# Altium PCB stm32f407_DB.PcbDoc
Units mil, origin at the board's own origin, x right, y up, seen from the top; angles counter-clockwise.
Board outline 2066.93 x 2066.93 mil, 2 copper layers (Top Layer, Bottom Layer); 49 components, 99 nets, 305 pads, 59 vias.
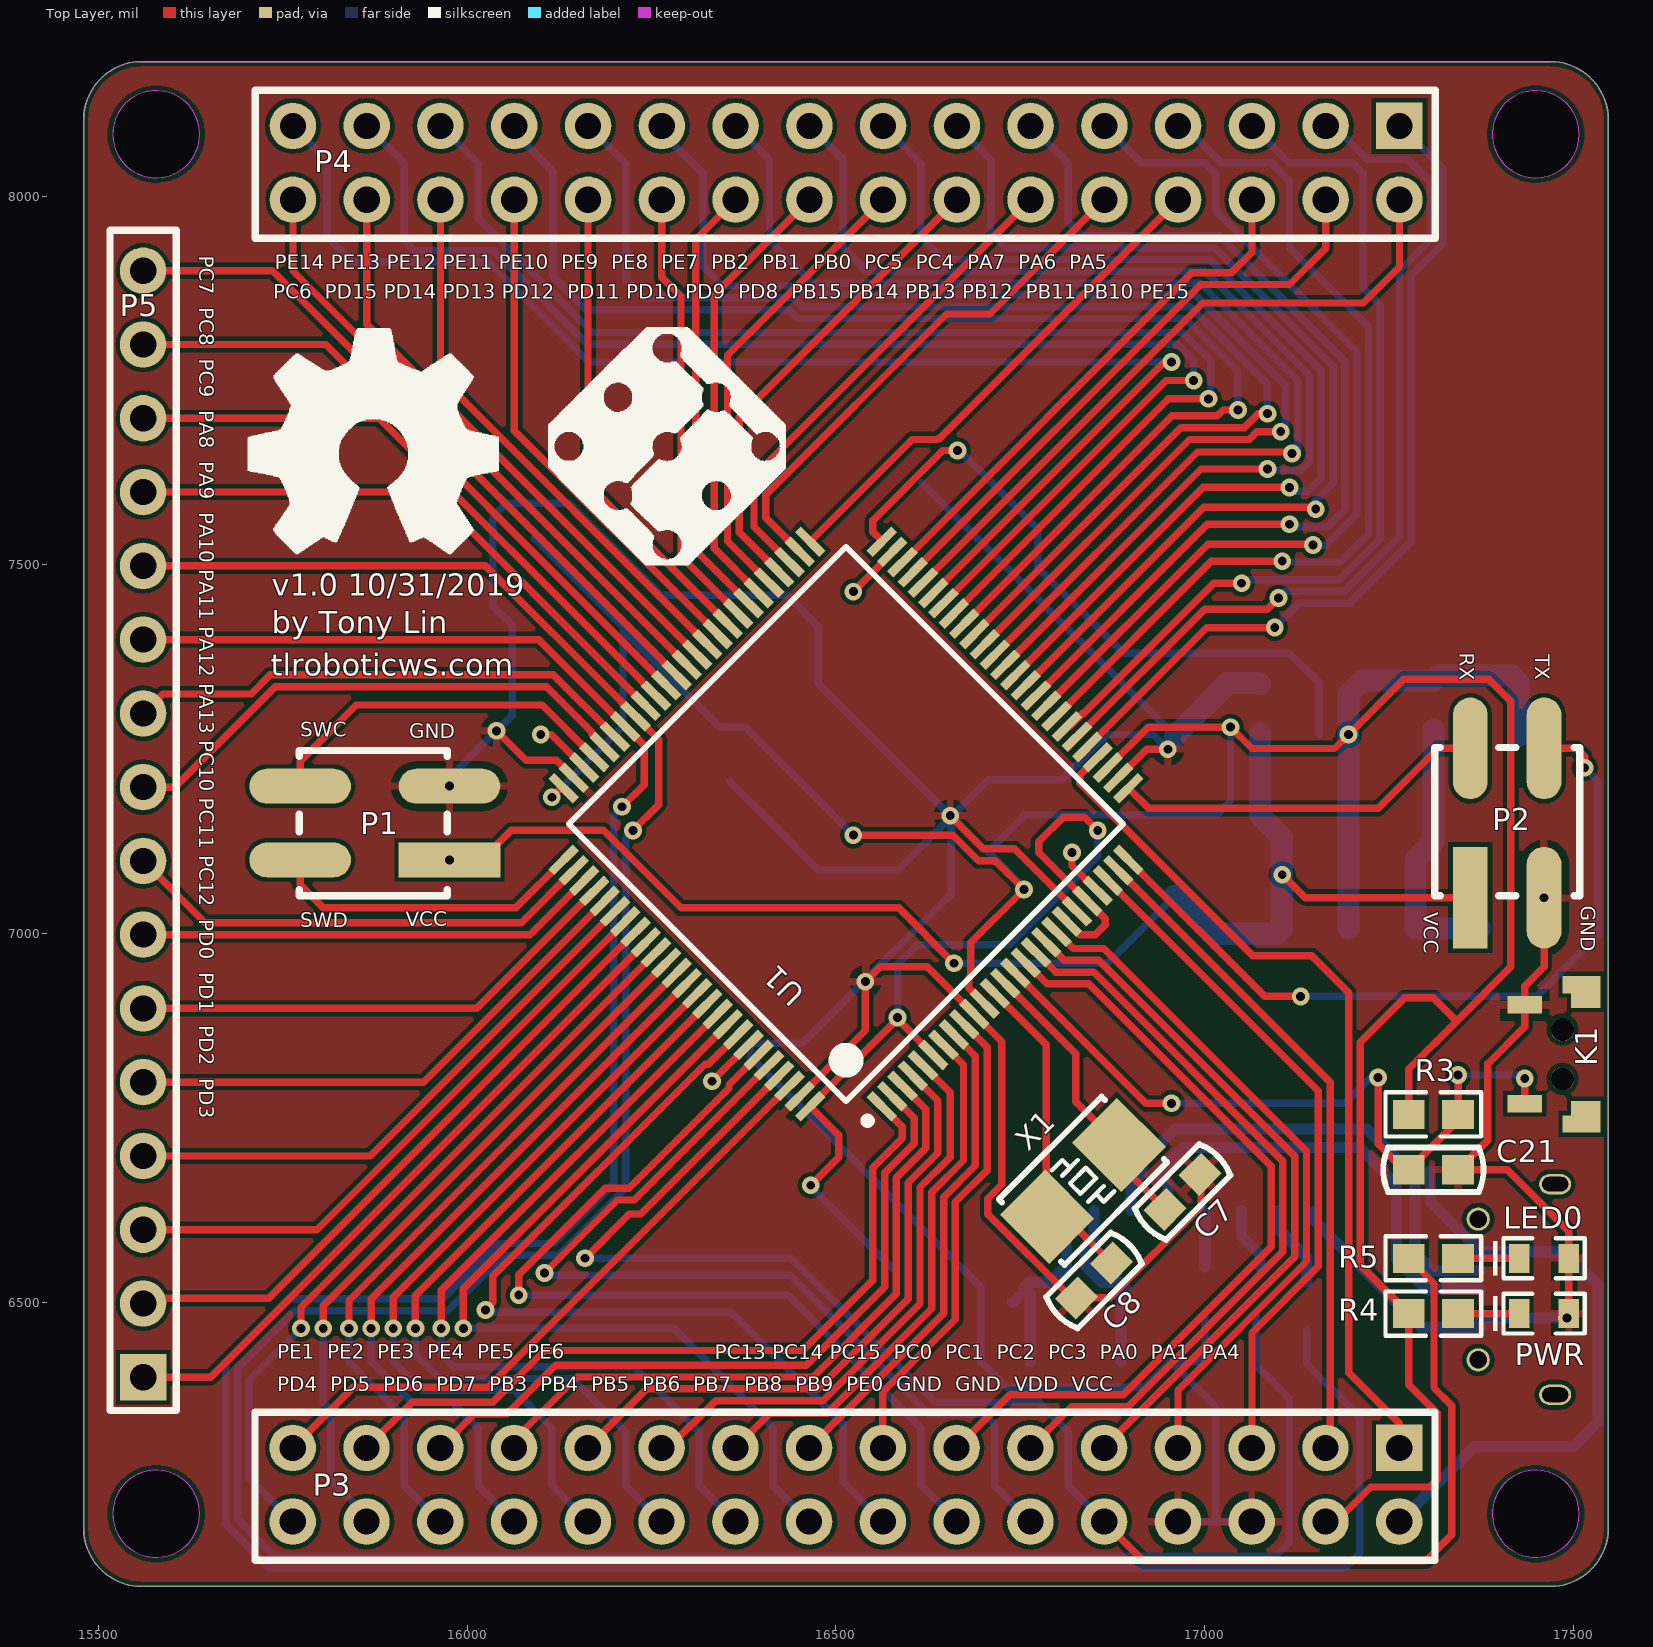
[diagram p0: Top Layer view]
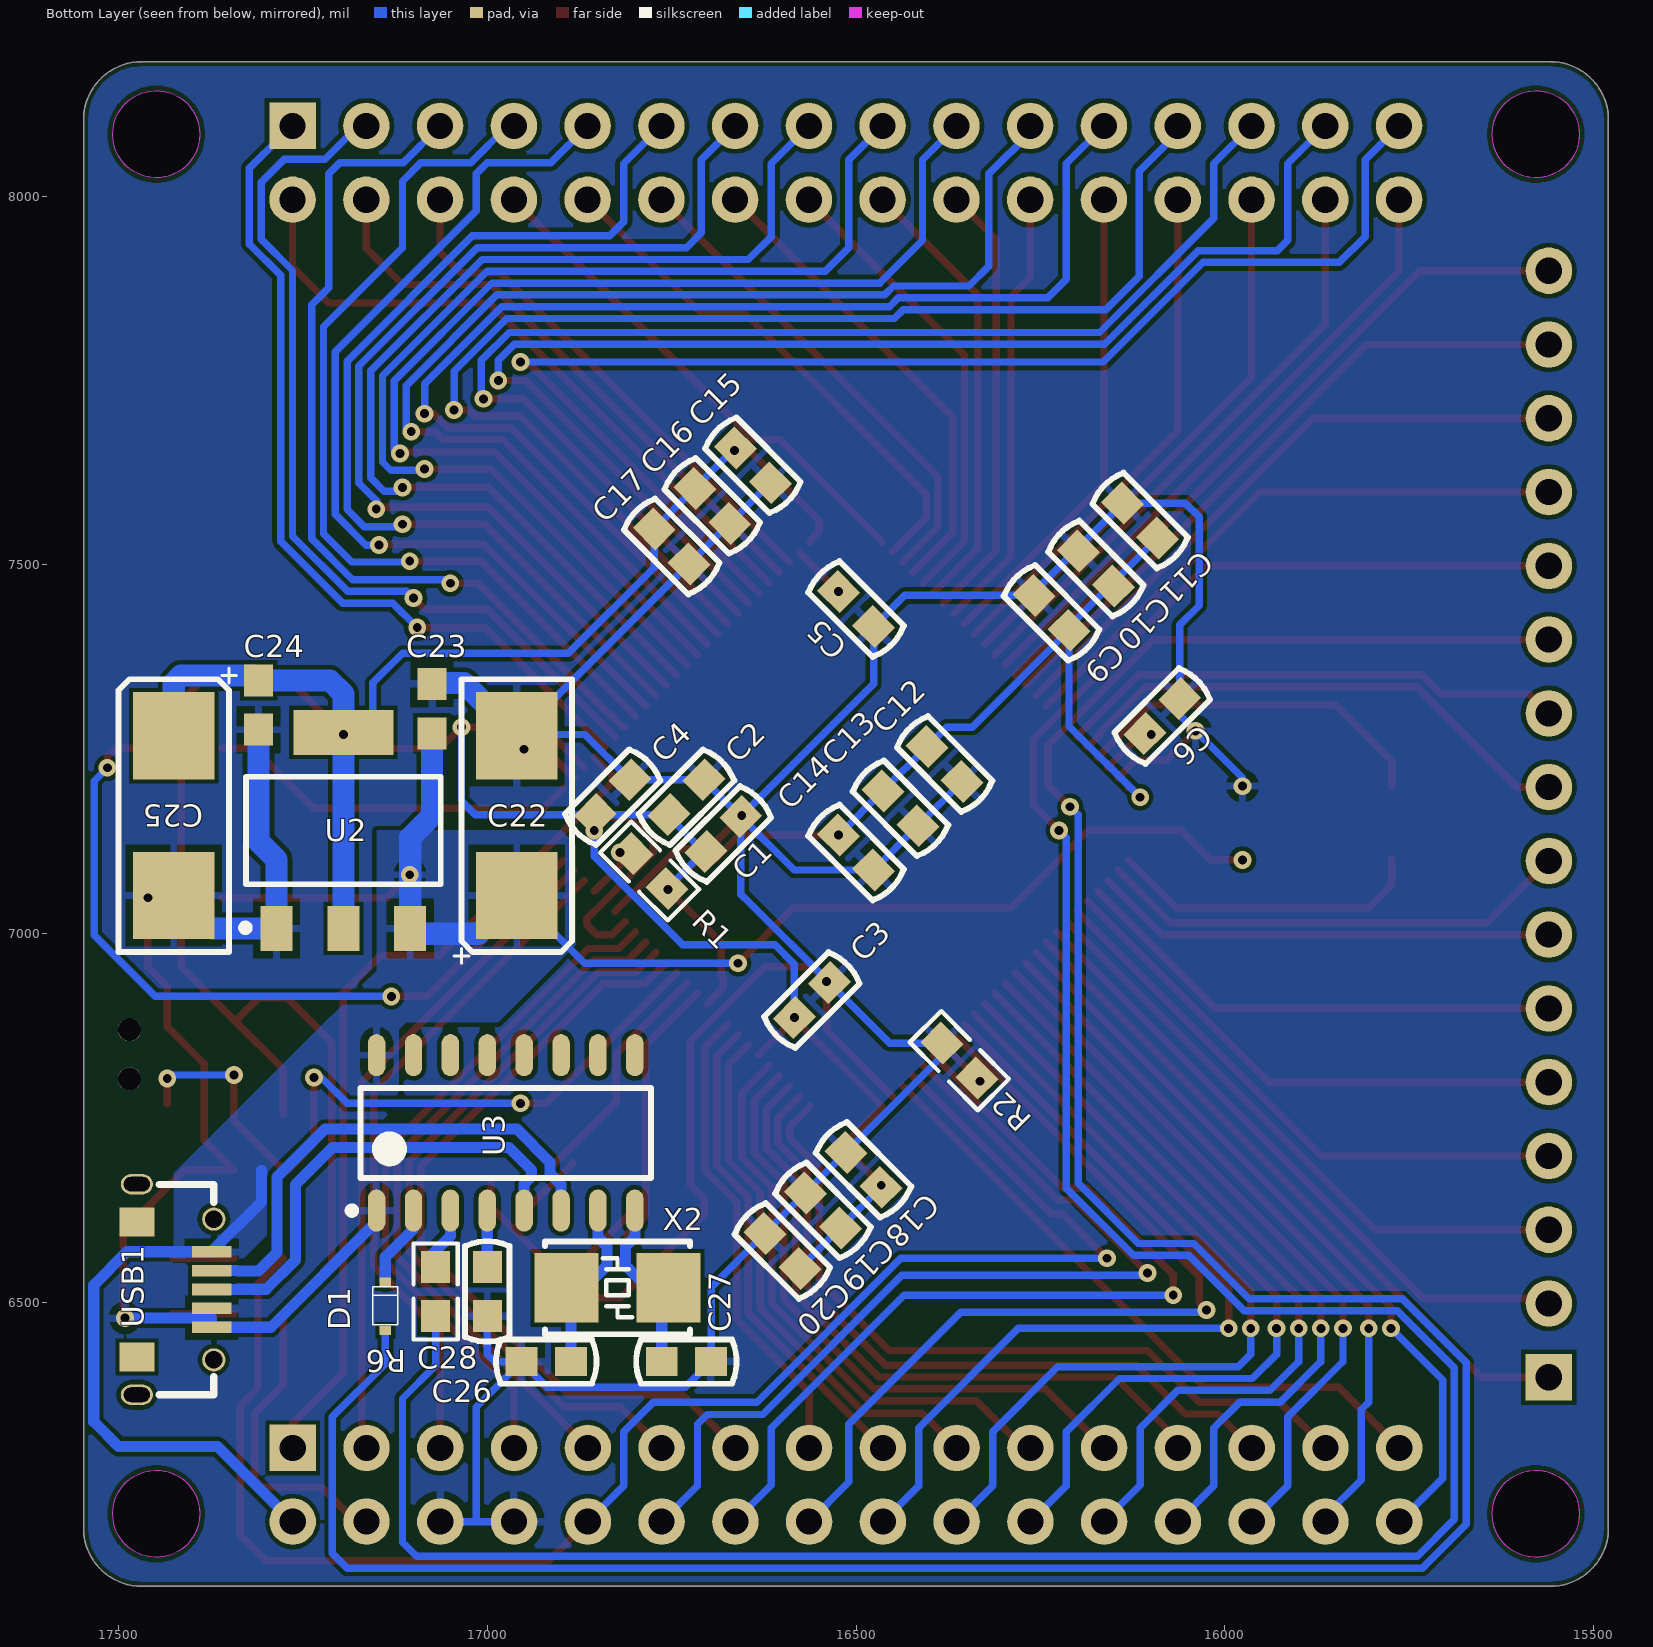
[diagram p1: Bottom Layer view, seen from below]
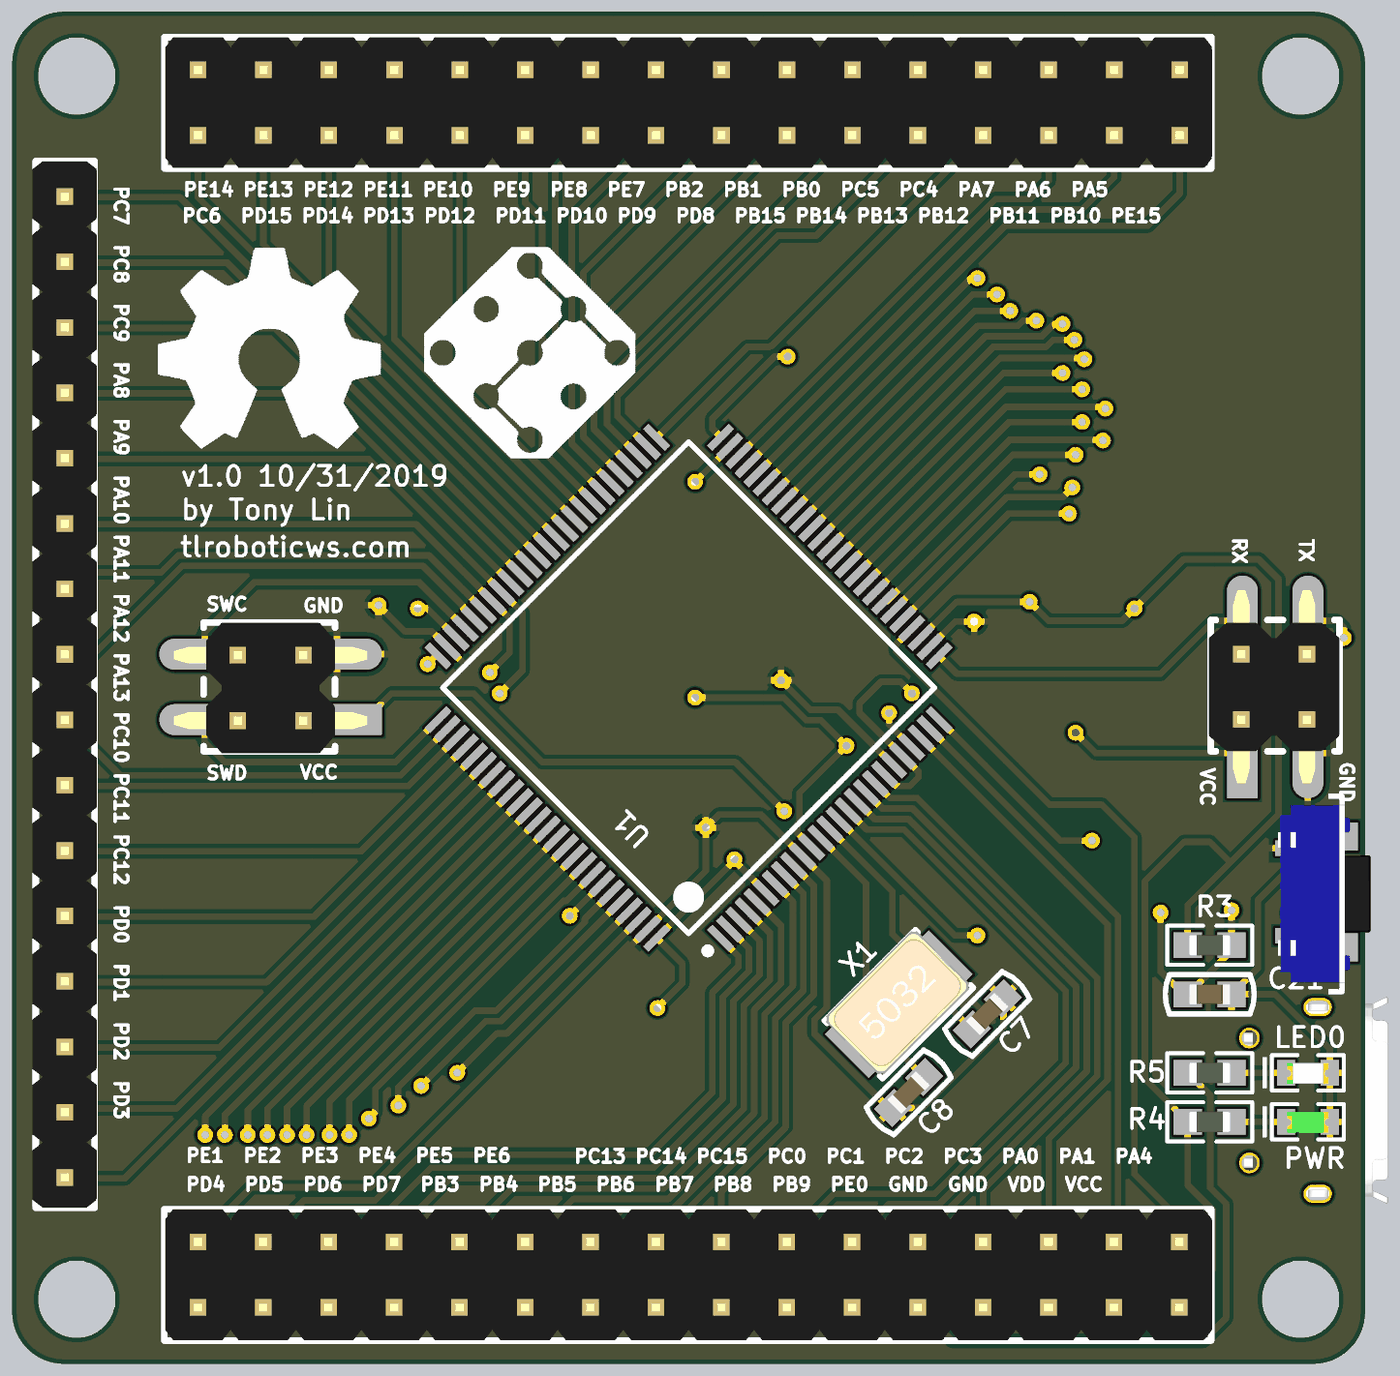
[diagram p2: 3D render of the assembled board from above, using the file's embedded part models]
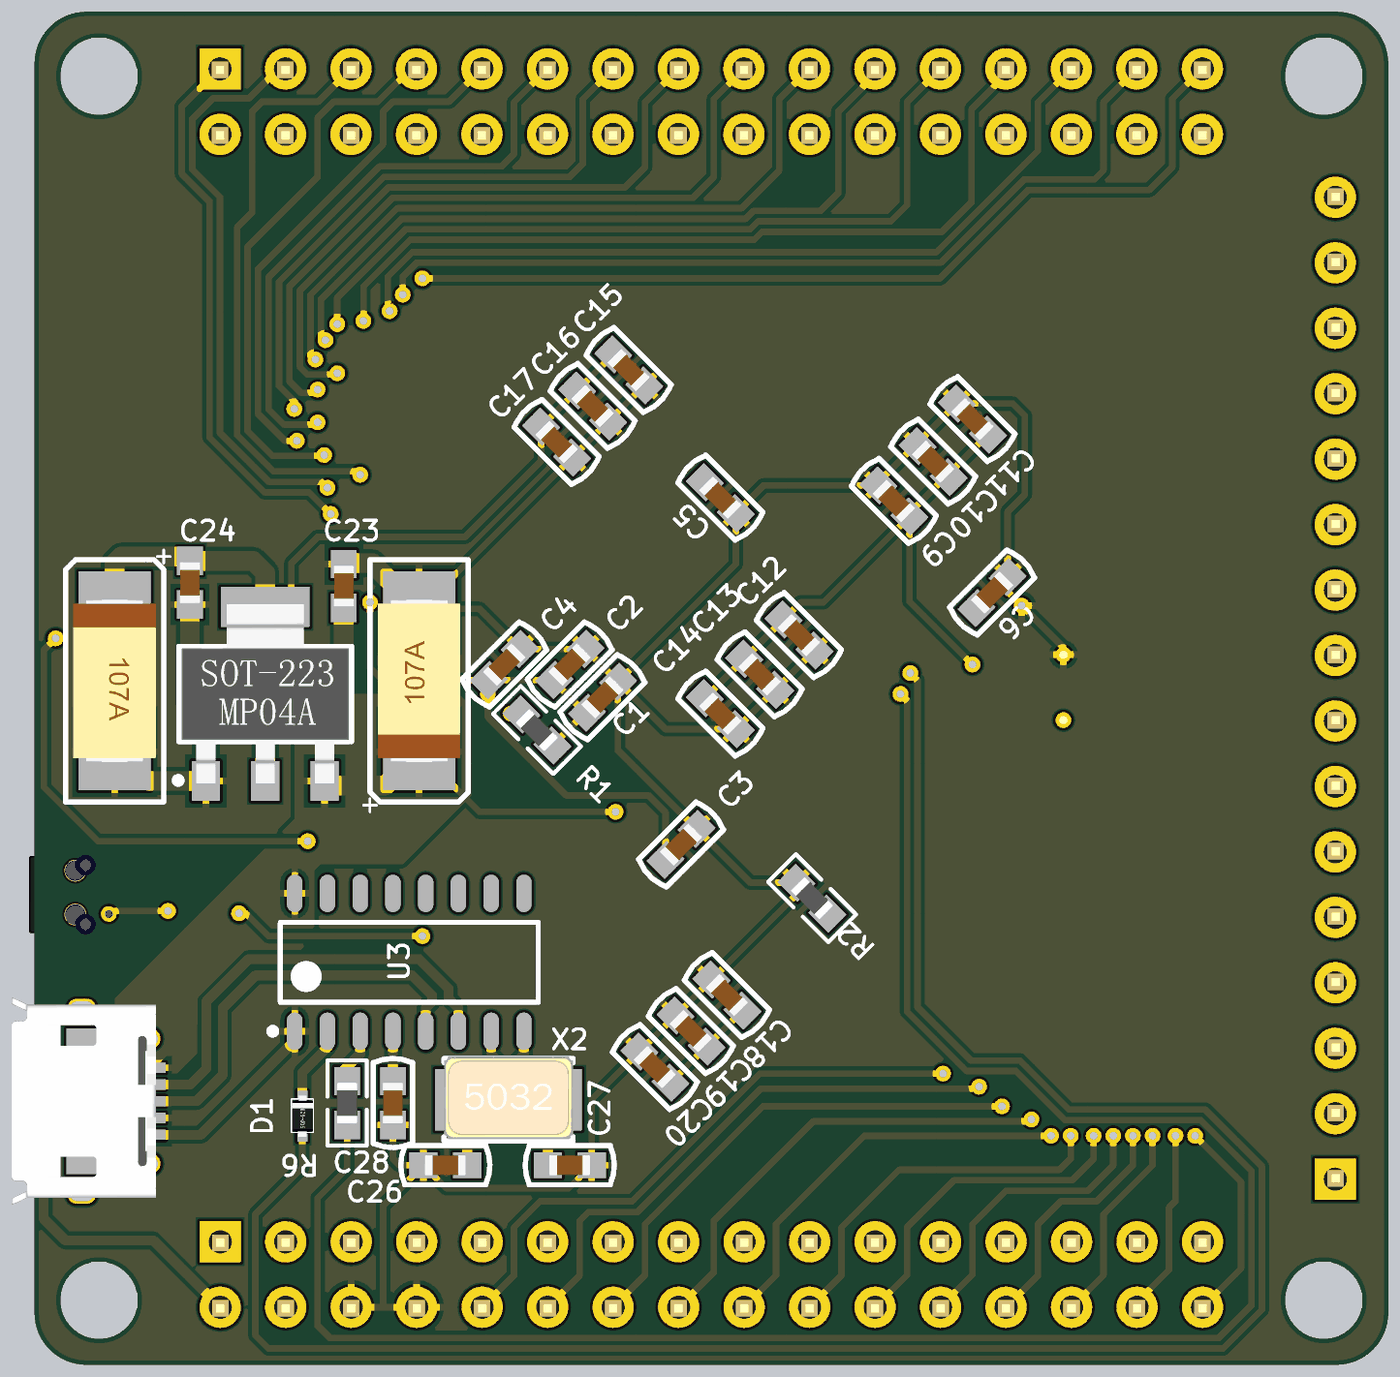
[diagram p3: 3D render of the assembled board from below, using the file's embedded part models]

## Layer stack, top to bottom
Top Solder: solder mask 0.4, Solder Resist, Dk 3.5
Top Layer: signal copper 1.4
Dielectric 1: dielectric 12.6, FR-4, Dk 4.8
Bottom Layer: signal copper 1.4
Bottom Solder: solder mask 0.4, Solder Resist, Dk 3.5

## Board outline
15480.25,6193.99 ccw(c15558.99,6193.99) 15558.99,6115.25 17468.44,6115.25 ccw(c17468.44,6193.99) 17547.18,6193.99 17547.18,8103.44 ccw(c17468.44,8103.44) 17468.44,8182.18 15558.99,8182.18 ccw(c15558.99,8103.44) 15480.25,8103.44
cut-out: 15519.62,6213.68 ccw(c15578.68,6213.68) 15578.68,6154.62 ccw(c15578.68,6213.68) 15637.73,6213.68 ccw(c15578.68,6213.68) 15578.68,6272.73 ccw(c15578.68,6213.68)
cut-out: 17389.7,6213.68 ccw(c17448.75,6213.68) 17448.75,6154.62 ccw(c17448.75,6213.68) 17507.81,6213.68 ccw(c17448.75,6213.68) 17448.75,6272.73 ccw(c17448.75,6213.68)
cut-out: 17389.7,8083.75 ccw(c17448.75,8083.75) 17448.75,8024.7 ccw(c17448.75,8083.75) 17507.81,8083.75 ccw(c17448.75,8083.75) 17448.75,8142.81 ccw(c17448.75,8083.75)
cut-out: 15519.62,8083.75 ccw(c15578.68,8083.75) 15578.68,8024.7 ccw(c15578.68,8083.75) 15637.73,8083.75 ccw(c15578.68,8083.75) 15578.68,8142.81 ccw(c15578.68,8083.75)

## Design rules (kind name [scope] priority, off if disabled: settings)
Clearance [All] p1: gap=6
DiffPairsRouting [All] p1: maxlimit=10 minlimit=10 mostfreqgap=10 toplayer_minwidth=15 toplayer_maxwidth=15 toplayer_prefwidth=15 bottomlayer_minwidth=15 bottomlayer_maxwidth=15 bottomlayer_prefwidth=15 maxuncoupledlength=500
PolygonConnect [All] p1: connectstyle=Relief reliefconductorwidth=10 reliefentries=4 polygonreliefangle="90 Angle" airgapwidth=10
RoutingVias [All] p1: holewidth=28 width=50 viastyle="Through Hole" minholewidth=28 minwidth=50 maxholewidth=28 maxwidth=50
SolderMaskExpansion [All] p1: expansion=4
Width [All] p1: maxlimit=100 minlimit=6 preferedwidth=10
29 further rules are at their usual default settings.

## Classes and differential pairs
differential pair X: +X_P -X_N
differential pair USB: +USB_P -USB_N

## Components (designator, comment, footprint, x,y, rotation, side; value= is the part's Value field where it differs from the comment)
C1 "10uF" Cap-0603 16680,7135 r135 bottom
C2 "104" Cap-0603 16730,7185 r135 bottom
C3 "0.1uF" Cap-0603 16560,6910 r315 bottom
C4 "10nF" Cap-0603 16830,7185 r315 bottom
C5 "2.2uF" Cap-0603 16500,7440 r45 bottom
C6 "2.2uF" Cap-0603 16085,7295 r315 bottom
C7 "22pF" Cap-0603 16970,6650 r45 top
C8 "22pF" Cap-0603 16850,6530 r45 top
C9 "104" Cap-0603 16235,7435 r225 bottom
C10 "104" Cap-0603 16175,7495 r225 bottom
C11 "104" Cap-0603 16115,7560 r225 bottom
C12 "104" Cap-0603 16380,7230 r45 bottom
C13 "104" Cap-0603 16440,7170 r45 bottom
C14 "104" Cap-0603 16500,7110 r45 bottom
C15 "104" Cap-0603 16640,7635 r45 bottom
C16 "104" Cap-0603 16695,7580 r45 bottom
C17 "104" Cap-0603 16750,7525 r45 bottom
C18 "104" Cap-0603 16490,6680 r225 bottom
C19 "104" Cap-0603 16545,6625 r225 bottom
C20 "104" Cap-0603 16600,6570 r225 bottom
C21 "105" Cap-0603 17310,6680 r180 top
C22 "100uf" tan_cap_C 16960,7160 r90 bottom
C23 "104" Cap-0603-M 17075,7305 r270 bottom
C24 "104" Cap-0603-M 17310,7310 r90 bottom
C25 "100uf" tan_cap_C 17425,7160 r270 bottom
C26 "22pf" Cap-0603 16920,6420 r0 bottom
C27 "22pf" Cap-0603 16730,6420 r180 bottom
C28 "0.01uf" Cap-0603 17000,6515 r90 bottom
D1 "DIODE" SOD-523 17155,6470 r90 bottom
K1 "KEY" SW-SMD-2X4 17485,6870 r270 top
LED0 "LED_SMD_WHITE" LED_0603_W 17460,6560 r0 top
P1 "Header_2X2" Header_SMD_2.54X2 15875,7150 r90 top
P2 "Header_2X2" Header_SMD_2.54X2 17410,7150 r0 top
P3 "Header_2X16" "Header 2.54_2X16" 16513.71,6253 r180 top
P4 "Header_2X16" "Header 2.54_2X16" 16514,8045 r180 top
P5 "Header_16" "Header 2.54X16" 15561,7148.71 r90 top
PWR "LED_BLUE" LED_0603_B 17460,6485 r0 top
R1 "10R" Res-0603 16780,7085 r45 bottom
R2 "10K" Res-0603 16360,6827.97 r225 bottom
R3 "10K" Res-0603 17310,6755 r0 top
R4 "470R" Res-0603 17310,6485 r0 top
R5 "470R" Res-0603 17310,6560 r0 top
R6 "470R" Res-0603 17070,6515 r90 bottom
U1 "STM32F405VGT6" LQFP100_V 16513.71,7148.71 r135 top
U2 "AMS1117" AMS1117 17195,7140 r180 bottom
U3 "CH340G" SOP127P590X265-16N 16975,6730 r90 bottom
USB1 "USB-MICRO" USB-MICRO-SMD_C 17475,6375 r90 bottom
X1 "8M" "OSC 5032-2P" 16835,6665 r45 top
X2 "12M" "OSC 5032-2P" 16823.46,6520 r180 bottom

## Footprints (in the part's own frame and the unit in brackets; to place one, negate y for a bottom-side part, rotate by r counter-clockwise, add the part's x,y. Pads: shape width x height; smd on the part's side, far side on the other; paste and mask are expansions set on the pad)
AMS1117 [mm]
  rect 1.1x1.55 smd: 1(-2.3,-3.375) 2(0,-3.375) 3(2.3,-3.375)
  rect 3.45x1.55 smd: 4(0,3.375)
  silkscreen extent -3.5,-3.48 3.35,1.85, body extent -3.25,-3.48 3.25,3.48, height 1.7
Cap-0603 [mm]
  rect 1.1x1 smd: 1(-0.85,0) 2(0.85,0)
  silkscreen extent -1.73,-0.76 1.73,0.76, body extent -0.8,-0.4 0.8,0.4, height 0.6
Cap-0603-M [mm]
  rect 1.1x1 smd: 1(-0.85,0) 2(0.85,0)
  body extent -0.8,-0.4 0.8,0.4, height 0.6
"Header 2.54_2X16" [mm]
  rect 1.6x1.6 hole 0.9: 1(-19.05,-1.27)
  round 1.6 hole 0.9: 2(-16.51,-1.27) 3(-13.97,-1.27) 4(-11.43,-1.27) 5(-8.89,-1.27) 6(-6.35,-1.27) 7(-3.81,-1.27) 8(-1.27,-1.27) 9(1.27,-1.27) 10(3.81,-1.27) 11(6.35,-1.27) 12(8.89,-1.27) 13(11.43,-1.27) 14(13.97,-1.27) 15(16.51,-1.27) 16(19.05,-1.27) 17(19.05,1.27) 18(16.51,1.27) 19(13.97,1.27) 20(11.43,1.27) 21(8.89,1.27) 22(6.35,1.27) 23(3.81,1.27) 24(1.27,1.27) 25(-1.27,1.27) 26(-3.81,1.27) 27(-6.35,1.27) 28(-8.89,1.27) 29(-11.43,1.27) 30(-13.97,1.27) 31(-16.51,1.27) 32(-19.05,1.27)
  silkscreen extent -20.28,-2.5 20.35,2.6, body extent -20.32,-2.5 20.32,2.58, height 8.6
"Header 2.54X16" [mm]
  rect 1.6x1.6 hole 0.9: 1(-19.05,0)
  round 1.6 hole 0.9: 2(-16.51,0) 3(-13.97,0) 4(-11.43,0) 5(-8.89,0) 6(-6.35,0) 7(-3.81,0) 8(-1.27,0) 9(1.27,0) 10(3.81,0) 11(6.35,0) 12(8.89,0) 13(11.43,0) 14(13.97,0) 15(16.51,0) 16(19.05,0)
  silkscreen extent -20.19,-1.14 20.45,1.14, body extent -20.19,-1.23 20.45,1.27, height 8.3
Header_SMD_2.54X2 [mm]
  rect 1.2x3.5 smd: 1(-1.27,-2.57)
  oval 1.2x3.5 smd: 2(1.27,-2.57) 3(1.27,2.57) 4(-1.27,2.57)
  silkscreen extent -2.5,-2.5 2.5,2.6, body extent -2.58,-3.75 2.5,3.75, height 9.7
LED_0603_B [mm]
  rect 0.7x1 smd: 1(-0.85,0) 2(0.85,0)
  silkscreen extent -1.75,-0.69 1.4,0.69, body extent -0.8,-0.42 0.8,0.38, height 0.61
LED_0603_W [mm]
  rect 0.7x1 smd: 1(-0.85,0) 2(0.85,0)
  silkscreen extent -1.75,-0.69 1.4,0.69, body extent -0.8,-0.42 0.8,0.38, height 0.61
LQFP100_V [mm] "Thin QFP, 100-Leads, Body 14x14mm, Pitch 0.5mm, ST Recommended"
  rect 1.2x0.3 smd: 1(-7.75,6) 2(-7.75,5.5) 3(-7.75,5) 4(-7.75,4.5) 5(-7.75,4) 6(-7.75,3.5) 7(-7.75,3) 8(-7.75,2.5) 9(-7.75,2) 10(-7.75,1.5) 11(-7.75,1) 12(-7.75,0.5) 13(-7.75,0) 14(-7.75,-0.5) 15(-7.75,-1) 16(-7.75,-1.5) 17(-7.75,-2) 18(-7.75,-2.5) 19(-7.75,-3) 20(-7.75,-3.5) 21(-7.75,-4) 22(-7.75,-4.5) 23(-7.75,-5) 24(-7.75,-5.5) 25(-7.75,-6) 51(7.75,-6) 52(7.75,-5.5) 53(7.75,-5) 54(7.75,-4.5) 55(7.75,-4) 56(7.75,-3.5) 57(7.75,-3) 58(7.75,-2.5) 59(7.75,-2) 60(7.75,-1.5) 61(7.75,-1) 62(7.75,-0.5) 63(7.75,0) 64(7.75,0.5) 65(7.75,1) 66(7.75,1.5) 67(7.75,2) 68(7.75,2.5) 69(7.75,3) 70(7.75,3.5) 71(7.75,4) 72(7.75,4.5) 73(7.75,5) 74(7.75,5.5) 75(7.75,6)
  rect 0.3x1.2 smd: 26(-6,-7.75) 27(-5.5,-7.75) 28(-5,-7.75) 29(-4.5,-7.75) 30(-4,-7.75) 31(-3.5,-7.75) 32(-3,-7.75) 33(-2.5,-7.75) 34(-2,-7.75) 35(-1.5,-7.75) 36(-1,-7.75) 37(-0.5,-7.75) 38(0,-7.75) 39(0.5,-7.75) 40(1,-7.75) 41(1.5,-7.75) 42(2,-7.75) 43(2.5,-7.75) 44(3,-7.75) 45(3.5,-7.75) 46(4,-7.75) 47(4.5,-7.75) 48(5,-7.75) 49(5.5,-7.75) 50(6,-7.75) 76(6,7.75) 77(5.5,7.75) 78(5,7.75) 79(4.5,7.75) 80(4,7.75) 81(3.5,7.75) 82(3,7.75) 83(2.5,7.75) 84(2,7.75) 85(1.5,7.75) 86(1,7.75) 87(0.5,7.75) 88(0,7.75) 89(-0.5,7.75) 90(-1,7.75) 91(-1.5,7.75) 92(-2,7.75) 93(-2.5,7.75) 94(-3,7.75) 95(-3.5,7.75) 96(-4,7.75) 97(-4.5,7.75) 98(-5,7.75) 99(-5.5,7.75) 100(-6,7.75)
  silkscreen extent -7.87,-6.75 6.75,6.82, body extent -7,-7 7,7, height 1.6
"OSC 5032-2P" [mm]
  rect 2.2x2.4 smd: 1(-1.75,0) 2(1.75,0)
  silkscreen extent -2.5,-1.6 2.5,1.6, body extent -2.5,-1.52 2.5,1.68, height 0.86
Res-0603 [mm]
  rect 1.1x1 smd: 1(-0.85,0) 2(0.85,0)
  silkscreen extent -1.65,-0.76 1.65,0.76, body extent -0.8,-0.4 0.8,0.4, height 0.38
SOD-523 [mm] "塑封二极管"
  rect 0.3x0.4 smd: A(-0.203,-0.425) K(1.473,-0.425)
  silkscreen extent 0,-0.85 1.3,0, body extent -0.16,-0.83 1.44,-0.03, height 0.65
SOP127P590X265-16N [mm] "SOP, 16-Leads, Body 9.90x3.90mm, Pitch 1.27mm, IPC Medium Density"
  oval 1.45x0.6 smd: 1(-2.675,4.445) 2(-2.675,3.175) 3(-2.675,1.905) 4(-2.675,0.635) 5(-2.675,-0.635) 6(-2.675,-1.905) 7(-2.675,-3.175) 8(-2.675,-4.445) 9(2.675,-4.445) 10(2.675,-3.175) 11(2.675,-1.905) 12(2.675,-0.635) 13(2.675,0.635) 14(2.675,1.905) 15(2.675,3.175) 16(2.675,4.445)
  silkscreen extent -2.8,-5 1.55,5.42, body extent -1.95,-5 1.95,5, height 2.65
SW-SMD-2X4 [mm]
  rect 0.6x1.3 smd: 0(-1.55,0.65) 0(3.25,0.65)
  rect 0.6x1 smd: 0(-1.05,0.8) 0(2.75,0.8)
  round 0.8 hole 0.8: 0(0,0) 0(1.7,0)
  rect 0.6x1.2 smd: 1(-0.85,-1.3) 3(2.55,-1.3)
  body extent -2.97,-1.8 4.83,1.8, height 3.5
tan_cap_C [mm]
  rect 3x2.8 smd: 1(-2.75,0) 2(2.75,0)
  silkscreen extent -5.08,-1.91 4.7,2.16, body extent -3.15,-1.6 3.15,1.6, height 2.5
USB-MICRO-SMD_C [mm]
  oval 0.7x1.1 hole 0.5 slot 0.9 at 90 deg: 0(0,0) 0(7.25,0)
  round 0.8 hole 0.6: 0(1.2,-2.65) 0(6.05,-2.65)
  rect 1x1.2 smd: 0(1.3,0) 0(5.95,0)
  rect 0.4x1.35 smd: 1(4.925,-2.575) 2(4.275,-2.575) 3(3.625,-2.575) 4(2.975,-2.575) 5(2.325,-2.575)
  silkscreen extent 0,-2.65 7.24,-0.76, body extent -0.37,-2.87 7.63,2.73, height 2.8

## Part data
C1 C2 C3 C4 C5 C6 C7 C8 C9 C10 C11 C12 C13 C14 C15 C16 C17 C18 C19 C20: library part CAP, "贴片陶瓷电容"
C21 C23 C24 C26 C27: library part CAP
C22 C25: library part tan_cap
C28: library part Cap
D1: "普通二极管"
LED0: "发光二极管"
PWR: library part LED_SMD_BLUE, "发光二极管"
R1 R2 R3 R4 R5 R6: library part RES, "贴片电阻"
U1: "ARM Cortex-M4 32b MCU+FPU, 210DMIP, 1024 kB Flash, 192+4 kB RAM, 82 I/Os, 100-pin LQFP, -40 to +85癈, Tray"
X1 X2: library part XTAL-2P, "2脚无源脚晶振"

## Via types
v1: diameter 24, hole 12, Top Layer to Bottom Layer, 59 vias

## Nets (pads, with @x,y where several pads share a name; then routed paths per layer and width w, separated by ;. In a path a pad name is that pad's centre, name@x,y a point inside that pad or via, vN(x,y) a via of type N, cw(c..) or ccw(c..) an arc to the next point about the centre after c; other vN are vias at no path point)
BOOT0: R2.2 U1.94 | length 69.9
  Top Layer w10: v1(16332.03,6800) U1.94
GND: C1.2 C2.2 C3.1 C4.1 C5.1 C6.1 C7.2 C8.1 C9.1 C10.1 C11.1 C12.1 C13.1 C14.1 C15.1 C16.1 C17.1 C18.1 C19.1 C20.1 C21.1 C22.2 C23.1 C24.1 C25.2 C26.2 C27.2 C28.1 K1.1 LED0.2 P1.2 P2.2 P3.29 P3.30 PWR.2 R2.1 U1.10 U1.20 U1.27 U1.74 U1.99 U2.1 U3.1 USB1.4 USB1.5 | length 7382.8
  Top Layer w10: v1(16040,7275) 16080,7235 16121.2,7235 U1.74 ; U1.99 16540,6868.77 v1(16540,6935) 16560,6955 16623.91,6955 U1.10 16725,6853.91 16725,6660 16706,6641 16706,6619.76 16819.43,6506.34 C8.1 16871.34,6506.34 16995,6630 C7.2@16995,6667.33 ; v1(16655,7160) 16700,7115 16742.17,7115 16826.77,7030.4 U1.20 ; U1.27 16921.23,7250 v1(16950,7250) ; v1(17460,7048.82) 17460,6955 17433.82,6928.82 K1.1 17433.82,6873.82 17383.46,6823.46 17383.46,6720 C21.1 17410,6680 17493.47,6596.53 LED0.2@17493.47,6576.53 ; PWR.2 LED0.2
  Bottom Layer w10: v1(15976.18,7200) 15976.18,7211.18 v1(16040,7275) 16061.34,7296.34 C6.1 16061.34,7418.66 16035,7445 16035,7565 16053.66,7583.66 C11.1 C9.1@16258.66,7463.66 ; C9.1 16434.01,7458.66 C5.1 16476.34,7338.66 C1.2 ; C12.1 C13.1 C14.1 16584.01,7086.34 C1.2 ; C3.1 16454.3,6851.63 R2.1 16383.66,6833.66 C18.1 C19.1 C20.1 16696.54,6520.79 C27.2 16731.54,6385 16918.46,6385 C26.2 ; C3.1@16536.34,6933.96 16643.37,7041 16643.67,7041 16656.34,7053.66 C1.2 ; C15.1 C16.1 C17.1 C22.2@16950,7277.67 ; v1(16950,7250) 16930,7270 16867.67,7270 C4.1 C2.2 C1.2 ; P3.29 17015,6203 ; C28.1 17000,6430 16990,6420 C26.2 ; P3.30 17015,6203 ; C26.2 17015,6358.46 17015,6203
  Bottom Layer w15: U3.1 17150,6610 17293.46,6466.54 USB1.5 17373.62,6479 v1(17491,6479)
  Bottom Layer w30: C22.2 17031.73,7340 17073.46,7340 C23.1 ; C24.1 17310,7125 17285.55,7100.55 U2.1 C25.2@17372.87,7007.13
JTCK: P1.4 U1.76 | length 430.8
  Top Layer w10: P1.4 15773.82,7066.18 15805,7035 16065.93,7035 U1.76
JTMS: P1.3 U1.72 | length 493.6
  Top Layer w10: P1.3 15773.82,7233.82 15850,7310 16101.88,7310 U1.72
NetC5_2: C5.2 U1.49 | length 75.7
  Top Layer w10: v1(16523.66,7463.66) 16576.35,7516.35 U1.49
NetC6_2: C6.2 U1.73 | length 77.3
  Top Layer w10: v1(16100,7270) 16114.04,7270 U1.73
NetC7_1: C7.1 U1.13 X1.2 | length 407.1
  Top Layer w10: U1.13 16825,6837.43 16825,6772.44 X1.2@16908.72,6688.72 ; X1.2@16883.72,6688.96 C7.1
NetC8_2: C8.2 U1.12 X1.1 | length 456
  Top Layer w10: U1.12 16785,6849.59 16785,6617.56 X1.1@16811.28,6591.28 ; X1.1@16811.04,6616.28 C8.2
NetC28_2: C28.2 U3.4 | length 76.2
  Bottom Layer w15: C28.2 U3.4
NetD1_K: D1.K U3.2 | length 112.5
  Bottom Layer w15: U3.2 17100,6600 17138.27,6561.73 D1.K
NetLED0_1: LED0.1 R5.2 | length 83.1
  Top Layer w10: R5.2 LED0.1
NetPWR_1: PWR.1 R4.2 | length 83.1
  Top Layer w10: R4.2 PWR.1
NetR1_2: R1.2 U1.22 | length 66.5
  Top Layer w10: v1(16820,7110) 16820,7092.33 16854.09,7058.24 U1.22
NetR6_2: R6.2 U3.3 | length 86.6
  Bottom Layer w15: U3.3 17050,6590 17075,6565 R6.2@17075,6548.46
NRST: C21.2 K1.3 R3.2 U1.14 | length 1001.5
  Top Layer w10: U1.14 16920.27,6770 v1(16955,6770) ; v1(17235,6805) 17235,6715 17270,6680 C21.2 17343.46,6746.93 R3.2 v1(17343.46,6808.46) ; K1.3 v1(17433.82,6803.82)
  Bottom Layer w10: v1(16955,6770) 17190,6770 17225,6805 v1(17235,6805) ; v1(17343.46,6808.46) v1@17429.17,6808.46
PA0: P3.3 U1.23 | length 924.7
  Top Layer w10: U1.23 17154,6786.82 17154,6549 17064,6459 17064,6303.29 P3.3
PA1: P3.2 U1.24 | length 904.7
  Top Layer w10: U1.24 17170,6798.66 17170,6309.29 P3.2
PA2: P2.3 U1.25 | length 1056.6
  Top Layer w10: U1.25 17081.5,6915 v1(17130,6915) ; P2.3 17503.82,7251.18 17515,7240 v1(17515,7225)
  Bottom Layer w10: v1(17130,6915) 17450,6915 17533,6998 17533,7207 v1(17515,7225)
PA3: P2.4 U1.26 | length 508.5
  Top Layer w10: U1.26 16923.93,7170 17235,7170 17316.18,7251.18 P2.4
PA4: P3.1 U1.29 | length 1172.6
  Top Layer w10: U1.29 16830.4,7214.85 16830.4,7204.6 17065,6970 17145,6970 17195,6920 17195,6405 17263.71,6336.29 P3.1
PA5: P4.1 U1.30 | length 1160
  Top Layer w10: U1.30 17002.71,7415 v1(17095,7415)
  Bottom Layer w10: v1(17095,7415) 17128,7448 17195.88,7448 17280,7532.12 17280,7892.37 17322.5,7934.87 17322.5,8037.5 17281,8079 17280,8079 P4.1
PA6: P4.2 U1.31 | length 1221.2
  Top Layer w10: U1.31 16999.87,7440 17085,7440 v1(17100,7455)
  Bottom Layer w10: v1(17100,7455) 17109,7464 17189.25,7464 17264,7538.75 17264,7899 17306.5,7941.5 17306.5,8018.5 17275,8050 17220,8050 17175,8095 P4.2
PA7: P4.3 U1.32 | length 1212.5
  Top Layer w10: U1.32 16816.91,7280.95 16834.87,7298.91 16836.15,7298.91 17012.24,7475 v1(17050,7475)
  Bottom Layer w10: v1(17050,7475) 17055,7480 17182.63,7480 17238,7535.37 17238,7852.63 17215,7875.63 17215,8030 17200,8045 17114,8045 P4.3
PA8: P5.13 U1.67 | length 801.6
  Top Layer w10: P5.13 15952.77,7598.71 16222.05,7329.44 16222.05,7329.03 U1.67
PA9: P5.12 R6.1 U1.68 | length 4035.8
  Top Layer w10: P5.12 16024.93,7498.71 16208.13,7315.52 16208.13,7315.11 U1.68 16260,7263.23 16260,7175 v1(16225,7140)
  Bottom Layer w10: v1(16225,7140) 16215,7130 16215,6655 16124,6564 16049,6564 15974,6489 15766.47,6489 15689,6411.53 15689,6206 15739,6156 17096,6156 17115,6175 17115,6370 17070,6415 R6.1
PA10: D1.A P5.11 U1.69 | length 4096.6
  Top Layer w10: P5.11 16097.09,7398.71 16194.21,7301.6 16194.21,7301.19 U1.69 16240,7255.4 16240,7202 v1(16210,7172)
  Bottom Layer w10: v1(16210,7172) 16199,7161 16199,6661.63 16117.37,6580 16042.37,6580 15967.37,6505 15759.85,6505 15673,6418.15 15673,6199.37 15732.37,6140 17190,6140 17210,6160 17210,6345 17138.27,6416.73 D1.A
PA11: P5.10 U1.70 | length 696.2
  Top Layer w10: P5.10 15587.29,7325 15707.37,7325 15733.37,7351 16116.97,7351 16200.53,7267.44 U1.70
PA12: P5.9 U1.71 | length 717.7
  Top Layer w10: P5.9 15603.71,7198.71 15740,7335 16107.63,7335 16168.65,7273.98 16168.65,7271.07 U1.71
PA15: P5.8 U1.77 | length 648
  Top Layer w10: P5.8 15644.71,7015 16073.77,7015 U1.77
PB0: P4.6 U1.35 | length 1334.1
  Top Layer w10: U1.35 17003.52,7555 v1(17115,7555)
  Bottom Layer w10: P4.6 16815,8044 16815,7965 16834,7946 17020.17,7946 17190,7776.17 17190,7575 17166.66,7551.66 17114.82,7551.66 17115,7551.48 v1(17115,7555)
PB1: P4.7 U1.36 | length 1401.5
  Top Layer w10: U1.36 16998.68,7578 17148.16,7578 v1(17150.58,7575.58)
  Bottom Layer w10: P4.7 16710,8049 16710,7950 16730,7930 17013.55,7930 17174,7769.55 17174,7611 17149.66,7586.66 17150.58,7585.74 v1(17150.58,7575.58)
PB2: P4.8 U1.37 | length 1466.9
  Top Layer w10: U1.37 16997.84,7605 v1(17115,7605)
  Bottom Layer w10: P4.8 16615,8044 16615,7945 16646,7914 17006.92,7914 17158,7762.92 17158,7618 17140,7600 17115,7600 v1(17115,7605)
PB3: P3.21 U1.89 | length 1069.1
  Top Layer w10: v1(15900,6465) 15900,6507.16 U1.89
  Bottom Layer w10: v1(15900,6465) 15900,6420 15939,6381 16064,6381 16115,6330 16115,6252.63 16163.71,6203.91 P3.21
PB4: P3.22 U1.90 | length 1109.7
  Top Layer w10: v1(15930,6465) 15930,6509.32 U1.90
  Bottom Layer w10: v1(15930,6465) 15930,6430 15963,6397 16143,6397 16215,6325 16215,6251.71 P3.22
PB5: P3.23 U1.91 | length 1152.1
  Top Layer w10: v1(15965,6465) 15965,6516.48 U1.91
  Bottom Layer w10: v1(15965,6465) 15965,6430 15982,6413 16227,6413 16315,6325 16315,6251.71 P3.23
PB6: P3.24 U1.92 | length 1183.9
  Top Layer w10: v1(15995,6465) 15995,6518.64 U1.92
  Bottom Layer w10: v1(15995,6465) 16280,6465 16415,6330 16415,6251.71 P3.24
PB7: P3.25 U1.93 | length 1221.5
  Top Layer w10: v1(16025,6490) 16035,6500 16035,6535.49 16322.51,6823 16327.19,6823 U1.93
  Bottom Layer w10: v1(16025,6490) 16028,6487 16358,6487 16510,6335 16510,6256.71 P3.25
PB8: P3.26 U1.95 | length 1245.8
  Top Layer w10: v1(16070,6510) 16070,6537.53 16187.47,6655 16219.56,6655 16355.03,6790.47 16355.03,6795.16 U1.95
  Bottom Layer w10: v1(16070,6510) 16435,6510 16615,6330 16615,6252.63 16663.71,6203.91 P3.26
PB9: P3.27 U1.96 | length 1268.1
  Top Layer w10: v1(16105,6540) 16204,6639 16226.71,6639 U1.96
  Bottom Layer w10: v1(16105,6540) 16108,6537 16438,6537 16626.69,6348.31 16701.69,6348.31 16715,6335 16715,6251.71 P3.27
PB10: P4.31 U1.47 | length 807.8
  Top Layer w10: U1.47 16994.45,7880 17115,7880 17164,7929 P4.31
PB11: P4.30 U1.48 | length 718.8
  Top Layer w10: U1.48 16982.61,7896 17036,7896 17064,7924 P4.30
PB12: P4.29 U1.51 | length 691
  Top Layer w10: U1.51 16603.5,7670 16637.37,7670 16638.37,7671 16640,7671 P4.29
PB13: P4.28 U1.52 | length 721.2
  Top Layer w10: U1.52 16405,7563.66 16405,7595 16650,7840 16709,7840 P4.28
PB14: P4.27 U1.53 | length 666.6
  Top Layer w10: U1.53 16389,7551.82 16389,7620 P4.27
PB15: P4.26 U1.54 | length 649.9
  Top Layer w10: U1.54 16369,7543.98 16369,7700 P4.26
PC0: P3.7 U1.15 | length 1095.6
  Top Layer w10: P3.7 16735.71,6375 16889.49,6375 17090,6575.51 17090,6685 16843,6932 16786.11,6932 U1.15
PC1: P3.6 U1.16 | length 1027.2
  Top Layer w10: P3.6 16819.71,6359 16896.12,6359 17106,6568.88 17106,6691.63 16849.63,6948 16797.95,6948 U1.16
PC2: P3.5 U1.17 | length 959.4
  Top Layer w10: U1.17 16809.78,6964 16856.25,6964 17122,6698.25 17122,6562.25 16863.71,6303.97 P3.5
PC3: P3.4 U1.18 | length 936.3
  Top Layer w10: U1.18 16821.62,6980 16862.88,6980 17138,6704.88 17138,6555.63 16963.71,6381.34 P3.4
PC4: P4.4 U1.33 | length 1231
  Top Layer w10: U1.33 17009.6,7505.4 17010,7505 v1(17105,7505)
  Bottom Layer w10: P4.4 16972.63,8095 17022.63,8045 17090,8045 17115,8020 17115,7930 17222,7823 17222,7542 17183.82,7503.82 17111.18,7503.82 17110,7505 v1(17105,7505)
PC5: P4.5 U1.34 | length 1248
  Top Layer w10: U1.34 17004.36,7528 17145.64,7528 v1(17146.82,7526.82)
  Bottom Layer w10: P4.5 16914,8045 17000,8045 17015,8030 17015,7980 17206,7789 17206,7568.37 17164.45,7526.82 v1(17146.82,7526.82)
PC6: P4.17 U1.63 | length 851.7
  Top Layer w10: P4.17 15764,7898.43 U1.63
PC7: P5.16 U1.64 | length 950.3
  Top Layer w10: P5.16 15736.29,7898.71 16263.81,7371.19 16263.81,7370.79 U1.64
PC8: P5.15 U1.65 | length 900.8
  Top Layer w10: P5.15 15808.45,7798.71 16249.89,7357.28 16249.89,7356.87 U1.65
PC9: P5.14 U1.66 | length 851.2
  Top Layer w10: P5.14 15880.61,7698.71 16235.97,7343.36 16235.97,7342.95 U1.66
PC10: P5.7 U1.78 | length 628.2
  Top Layer w10: P5.7 16085.33,6998.71 U1.78
PC11: P5.6 U1.79 | length 677.8
  Top Layer w10: P5.6 16013.16,6898.71 U1.79
PC12: P5.5 U1.80 | length 727.3
  Top Layer w10: P5.5 15941,6798.71 U1.80
PC13: P3.10 U1.7 | length 731.1
  Top Layer w10: P3.10 16410.71,6350 16488.09,6350 16630,6491.91 16630,6649.49 16673,6692.49 16673,6822.4 U1.7
PC14: P3.9 U1.8 | length 665.7
  Top Layer w10: P3.9 16646,6485.29 16646,6642.86 16689,6685.86 16689,6834.23 U1.8
PC15: P3.8 U1.9 | length 645.7
  Top Layer w10: P3.8 16563.71,6378.71 16662,6477 16662,6636.24 16705,6679.24 16705,6846.07 U1.9
PD0: P5.4 U1.81 | length 776.9
  Top Layer w10: P5.4 15868.84,6698.71 U1.81
PD1: P5.3 U1.82 | length 826.5
  Top Layer w10: P5.3 15796.68,6598.71 U1.82
PD2: P5.2 U1.83 | length 876.1
  Top Layer w10: P5.2 15567.91,6505.62 15731.43,6505.62 U1.83
PD3: P5.1 U1.84 | length 925.6
  Top Layer w10: P5.1 15652.36,6398.71 U1.84
PD4: P3.17 U1.85 | length 1024.4
  Top Layer w10: v1(15775,6465) 15775,6493.52 U1.85
  Bottom Layer w10: P3.17 15705,6261.71 15705,6395 v1(15775,6465)
PD5: P3.18 U1.86 | length 974.8
  Top Layer w10: v1(15805,6465) 15805,6495.68 U1.86
  Bottom Layer w10: v1(15805,6465) 15805,6365 15815,6355 15815,6260 15863.71,6211.29 P3.18
PD6: P3.19 U1.87 | length 979.1
  Top Layer w10: v1(15840,6465) 15840,6502.84 U1.87
  Bottom Layer w10: v1(15840,6465) 15840,6420 15915,6345 15915,6251.71 P3.19
PD7: P3.20 U1.88 | length 1019.7
  Top Layer w10: v1(15870,6465) 15870,6505 U1.88
  Bottom Layer w10: v1(15870,6465) 15870,6420 15925,6365 15980,6365 16015,6330 16015,6251.71 P3.20
PD8: P4.25 U1.55 | length 629.9
  Top Layer w10: U1.55 16353,7532.14 16353,7784 P4.25
PD9: P4.24 U1.56 | length 611.6
  Top Layer w10: U1.56 16335,7522.3 16335,7866 P4.24
PD10: P4.23 U1.57 | length 599
  Top Layer w10: P4.23 16310,7941 16310,7519.46 U1.57
PD11: P4.22 U1.58 | length 603.8
  Top Layer w10: P4.22 16264,7890 16290,7864 16290,7511.62 U1.58
PD12: P4.21 U1.59 | length 653.4
  Top Layer w10: P4.21 16164,7609.78 U1.59
PD13: P4.20 U1.60 | length 703
  Top Layer w10: P4.20 16064,7681.95 U1.60
PD14: P4.19 U1.61 | length 752.6
  Top Layer w10: P4.19 15964,7754.11 U1.61
PD15: P4.18 U1.62 | length 802.1
  Top Layer w10: P4.18 15864,7826.27 U1.62
PE0: P3.28 R5.1 U1.97 | length 2167.3
  Top Layer w10: v1(16160,6560) 16220,6620 16235.55,6620 U1.97 ; P3.28 16916.71,6150 17300,6150 17335,6185 17335,6360 17310.81,6384.19 17310.81,6525.72 R5.1
  Bottom Layer w10: v1(16160,6560) 16439.31,6560 16634.31,6365 16775,6365 16815,6325 16815,6251.71 P3.28
PE1: P3.16 U1.98 | length 876.7
  Top Layer w10: P3.16 15845.71,6385 16028.39,6385 U1.98
PE2: P3.15 U1.1 | length 1044.2
  Top Layer w10: P3.15 15925.71,6365 16035,6365 16105,6435 16455,6435 16550,6530 16550,6682.63 16590,6722.63 16590,6738.36 U1.1
PE3: P3.14 U1.2 | length 980.3
  Top Layer w10: P3.14 16009.71,6349 16054,6349 16120,6415 16460,6415 16566,6521 16566,6676 16606,6716 16606,6750.2 U1.2
PE4: P3.13 U1.3 | length 922.7
  Top Layer w10: P3.13 16063.71,6313.71 16149,6399 16469.2,6399 16582,6511.8 16582,6669.37 16622,6709.37 16622,6762.04 U1.3
PE5: P3.12 U1.4 | length 851.1
  Top Layer w10: P3.12 16243.71,6383 16475.83,6383 16598,6505.17 16598,6662.75 16638,6702.75 16638,6773.88 U1.4
PE6: P3.11 U1.5 | length 786.6
  Top Layer w10: P3.11 16273,6303 16337,6367 16482.46,6367 16614,6498.54 16614,6656.12 16655,6697.12 16655,6784.72 U1.5
PE7: P4.9 U1.38 | length 1532.9
  Top Layer w10: U1.38 16995,7630 v1(17085,7630)
  Bottom Layer w10: P4.9 16510,8049 16510,7930 16542,7898 17000.29,7898 17142,7756.29 17142,7639.47 17130.53,7628 17124.53,7628 17087,7628 v1(17085,7630)
PE8: P4.10 U1.39 | length 1589.7
  Top Layer w10: U1.39 16990.16,7653 17116.43,7653 v1(17118.43,7651)
  Bottom Layer w10: P4.10 16410,8049 16410,7940 16468,7882 16993.66,7882 17126,7749.66 17126,7656 17121,7651 v1(17118.43,7651)
PE9: P4.11 U1.40 | length 1657.9
  Top Layer w10: U1.40 16979.32,7670 17060.15,7670 17070.73,7680.57 v1(17103,7680.57)
  Bottom Layer w10: P4.11 16264,8086 16320,8030 16320,7905 16347,7878 16449.37,7878 16461.37,7866 16987.04,7866 17110,7743.04 17110,7685 17108.43,7683.43 17105.57,7680.57 v1(17103,7680.57)
PE10: P4.12 U1.41 | length 1719.2
  Top Layer w10: U1.41 16967.48,7686 17053.53,7686 17072.53,7705 v1(17085,7705)
  Bottom Layer w10: P4.12 16215,8044 16215,7887 16240,7862 16442.75,7862 16454.75,7850 16980.41,7850 17085,7745.41 v1(17085,7705)
PE11: P4.13 U1.42 | length 1751.3
  Top Layer w10: U1.42 16955.64,7702 17016.95,7702 17024.95,7710 v1(17045,7710)
  Bottom Layer w10: P4.13 16064,8086 16116.31,8033.69 16116.31,7891.31 16161.63,7846 16436.12,7846 16448.12,7834 16973.78,7834 17045,7762.78 v1(17045,7710)
PE12: P4.14 U1.43 | length 1738
  Top Layer w10: U1.43 16950.81,7725 v1(17005,7725)
  Bottom Layer w10: P4.14 16015,8044 16015,7970 16170,7815 16970.15,7815 17008,7777.15 17008,7728 v1(17005,7725)
PE13: P4.15 U1.44 | length 1805.1
  Top Layer w10: U1.44 16947.97,7750 v1(16985,7750)
  Bottom Layer w10: P4.15 15915,8044 15915,7940 15929,7926 16036.37,7926 16163.37,7799 16963.53,7799 16985,7777.53 v1(16985,7750)
PE14: P4.16 U1.45 | length 1837.1
  Top Layer w10: U1.45 16945.13,7775 v1(16955,7775)
  Bottom Layer w10: P4.16 15810,8049 15810,7945 15845,7910 16029.75,7910 16164.75,7775 v1(16955,7775)
PE15: P4.32 U1.46 | length 914.2
  Top Layer w10: U1.46 16997.29,7855 17215,7855 17264,7904 P4.32
USB_N: U3.6 USB1.2 | length 688.7
  Bottom Layer w15: U3.6 16900,6660.73 16900.73,6660.73 16915,6675 16915,6690 16960,6735 17220.12,6735 17285,6670.12 17285,6568.01 17310,6543.01 17339.25,6543.01 17339.55,6543.31 USB1.2
USB_P: U3.5 USB1.3 | length 644.8
  Bottom Layer w15: U3.5 16950,6660.73 16940,6670.73 16940,6679.64 16970.36,6710 17209.77,6710 17260,6659.77 17260,6557.66 17299.64,6518.01 17339.25,6518.01 17339.55,6517.72 USB1.3
VCC: C22.1 C23.2 P1.1 P2.1 P3.32 U2.3 U3.16 USB1.1 | length 2653.8
  Top Layer w10: v1(15976.18,7100) 16020,7100 16060,7140 16185,7140 16290,7035 16585,7035 v1(16660,6960) ; v1(17105,7080) 17136.18,7048.82 P2.1
  Bottom Layer w10: v1(16660,6960) 16868.27,6960 C22.1
  Bottom Layer w15: P3.32 17365.71,6305 17500,6305 17533.43,6338.43 17533.43,6523.57 17488.1,6568.9 USB1.1 17306,6636.5 17306,6678.82
  Bottom Layer w30: C22.1 17011.73,7000 17097.32,7000 U2.3 17104.45,7130.55 17075,7160 C23.2
VDD: C1.1 C2.1 C3.2 C4.2 C9.2 C10.2 C11.2 C12.2 C13.2 C14.2 C15.2 C16.2 C17.2 C18.2 C19.2 C20.2 C24.2 C25.1 P3.31 R1.1 R3.1 R4.1 U1.6 U1.11 U1.19 U1.21 U1.28 U1.50 U1.75 U1.100 U2.2 U2.4 | length 6929.1
  Top Layer w10: v1(16115,7185) 16127.43,7197.43 U1.75 ; v1(16466,6659) 16504,6697 16504,6726.93 U1.100 16582.96,6883.89 16583.66,6883.89 U1.6 ; v1(16523.66,7133.66) 16658.71,7133.66 16693.37,7099 16716,7099 v1(16755,7060) 16683,6988 16683,6943 16680,6940 16680,6926.75 U1.11 ; U1.50 16562.43,7532.57 16550,7545 16550,7560 16645,7655 v1(16665,7655) ; U1.19 16830.94,6998.52 16851.52,6998.52 16865,7012 16865,7020.14 U1.21 16775,7110.14 16775,7125 16808,7158 16837,7158 v1(16855,7140) ; U1.28 16923.39,7280 v1(17035,7280) 17064,7251 17176,7251 v1(17195,7270) 17270,7345 17385,7345 17415,7315 17415,6955 17341.5,6881.5 ; P3.31 17178,6203 17225,6250 17305,6250 17315,6260 17315,6350 17276.54,6388.46 R4.1 17211,6550.54 17211,6853 17271,6913 17310,6913 17341.5,6881.5 ; R3.1 17276.54,6816.54 17341.5,6881.5
  Bottom Layer w10: C11.2 C9.2@16211.34,7416.34 ; v1(16115,7185) 16211.34,7281.34 C9.2 16342.67,7280 16377.33,7280 C12.2 C13.2 v1(16523.66,7133.66) ; C18.2 C19.2 C20.2 ; v1(16583.66,6886.34) 16583.66,6958.66 16610,6985 16735,6985 16855,7105 v1(16855,7140) ; C15.2 C16.2 C17.2 16773.66,7496.34 16890,7380 17115,7380 17155,7340 U2.4@17155,7270 ; C2.1@16753.66,7158.66 16706.34,7111.34 R1.1 ; C2.1 C4.2 17016.34,7161.34 17035,7180 v1(17035,7280)
  Bottom Layer w30: U2.2 v1(17195,7270) U2.4 17195,7325 17213.46,7343.46 C24.2 17316.54,7350 17415,7350 17425,7340 C25.1
X_N: C26.1 U3.7 X2.1 | length 249.6
  Bottom Layer w15: U3.7 16850,6588.64 16837.5,6576.14 16837.5,6550 16860,6527.5 16884.86,6527.5 X2.1 16886.54,6514.17 C26.1
X_P: C27.1 U3.8 X2.2 | length 264.5
  Bottom Layer w15: X2.2@16739.57,6500 X2.2@16747.07,6507.5 ; C27.1 16763.46,6511.1 X2.2 16762.07,6527.5 16790,6527.5 16812.5,6550 16812.5,6576.14 16800,6588.64 U3.8
pads on no net: K1.0 U3.9 U3.10 U3.11 U3.12 U3.13 U3.14 U3.15 USB1.0

## Polygon pours and split planes (outlines as drawn)
GND on Bottom Layer "Top Layer-No Net" (solid, remove dead copper, pour order 8): 15270,8353 15144,8227 15144,5711 17999,5711 18112,5598 18079,5631 18079,8499
VCC on Bottom Layer "Top Layer-No Net" (solid, pour order 0): 17330,6560 17425,6560 17425,6675 17395,6705 17225,6875 17150,6950 17150,7140 16900,7140 16880,7120 16880,6985 16905,6960 16985,6880 17110,6880 17120,6870 17120,6770
GND on Top Layer "Top Layer-No Net" (solid, remove dead copper, pour order 6): 15124,8560 15124,5089 15186,5027 15665,5506 19048,5506 19048,8849 18585,9312

## Keep-outs
Keep-Out Layer:
  circle w0.5: c15578.68,6213.68 r59.06
  circle w0.5: c17448.75,6213.68 r59.06
  circle w0.5: c17448.75,8083.75 r59.06
  circle w0.5: c15578.68,8083.75 r59.06
  lines w0.5: 15480.25,6193.99 ccw(c15558.99,6193.99) 15558.99,6115.25 17468.44,6115.25 ccw(c17468.44,6193.99) 17547.18,6193.99 17547.18,8103.44 ccw(c17468.44,8103.44) 17468.44,8182.18 15558.99,8182.18 ccw(c15558.99,8103.44) 15480.25,8103.44 15480.25,6193.99

## Silkscreen, mask and mechanical layers (free items; w line width, h text height)
Top Overlay:
  drawing of 1395 lines, arcs and shapes, not listed
  text "PC7  PC8  PC9  PA8  PA9  PA10 PA11 PA12 PA13 PC10 PC11 PC12  PD0  PD1  PD2  PD3" at 15637,7919 h20 r270
  text "PE14 PE13 PE12 PE11 PE10  PE9  PE8  PE7  PB2  PB1  PB0  PC5  PC4  PA7  PA6  PA5" at 15739,7901 h20
  text "PC6  PD15 PD14 PD13 PD12  PD11 PD10 PD9  PD8  PB15 PB14 PB13 PB12  PB11 PB10 PE15" at 15737,7861 h20
  text "v1.0 10/31/2019" at 15735,7458 h30
  text "by Tony Lin" at 15735,7407 h30
  text "RX" at 17346,7381 h20 r270
  text "TX" at 17448,7379 h20 r270
  text "tlroboticws.com" at 15734,7350 h30
  text "SWC" at 15774,7267 h20
  text "GND" at 15922,7265 h20
  text "GND" at 17510,7038 h20 r270
  text "VCC" at 17297,7029 h20 r270
  text "VCC" at 15917,7010 h20
  text "SWD" at 15774,7009 h20
  text "PE1  PE2  PE3  PE4  PE5  PE6" at 15743,6424 h20
  text "PC13 PC14 PC15  PC0  PC1  PC2  PC3  PA0  PA1  PA4" at 16336,6423 h20
  text "PD4  PD5  PD6  PD7  PB3  PB4  PB5  PB6  PB7  PB8  PB9  PE0  GND  GND  VDD  VCC" at 15743,6380 h20